# Altium PCB Webbie-V3.3.PcbDoc (part 3 of 3)
Units mil, origin at the board's own origin, x right, y up, seen from the top; angles counter-clockwise.
Board outline 3937.01 x 1574.8 mil, 4 copper layers (Top Layer, GND, GND-POWER, Bottom Layer), stack 61.865 mil thick; 129 components, 99 nets, 520 pads, 260 vias.
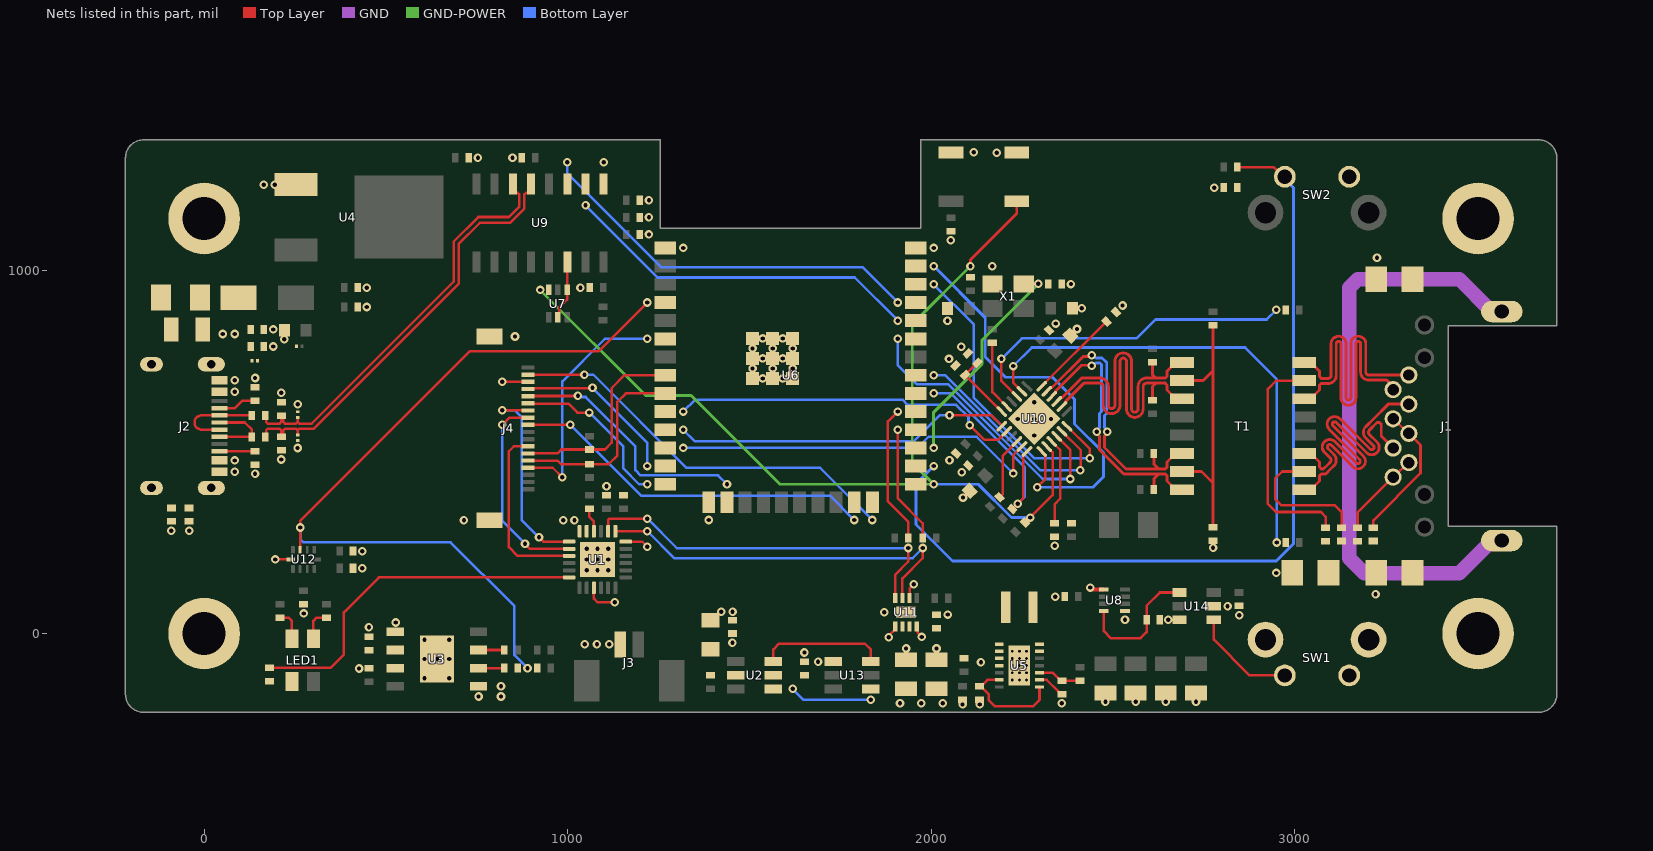
[diagram p4: the nets of this part, all layers, seen from the top]

## Via types
v1: diameter 23.62, hole 11.81, Top Layer to Bottom Layer, tented top, 251 vias
v2: diameter 19.68, hole 11.81, Top Layer to Bottom Layer, 9 vias

## Nets (pads, with @x,y where several pads share a name; then routed paths per layer and width w, separated by ;. In a path a pad name is that pad's centre, name@x,y a point inside that pad or via, vN(x,y) a via of type N, cw(c..) or ccw(c..) an arc to the next point about the centre after c; other vN are vias at no path point) (continued)
GND: C1.2 C2.2 C3.1 C4.1 C5.1 C6.1 C7.1 C8.1 C9.2 C10.2 C11.1 C12.2 C13.2 C14.1 C15.1 C16.1 C17.1 C18.1 C19.1 C20.2 C21.1 C22.1 C23.1 C24.2 C25.1 C26.1 C27.1 C28.2 C29.2 C30.1 C31.2 C32.1 C33.2 C34.2 C35.2 C36.1 C37.1 C38.1 C39.1 C40.1 C41.1 C42.2 C43.2 C45.1 D2.1 D3.2 D6.1 D7.1 J2.A1B12 J2.B1A12 J4.3 J4.MP1 J4.MP2 pad.G R1.2 R13.1 R16.1 R21.2 R24.1 R31.1 R32.1 R33.1 R43.1 R45.2 R48.1 R50.2 SW1.1 SW1.3 SW1.4 SW2.2 SW3.1 SW4.1 U1.9 U1.18 U1.23 U1.24 U1.25 U3.1 U3.3 U3.9 U4.1 U5.2 U5.15 U6.1 U6.15 U6.38 U6.39 U6.39_10 U6.39_11 U6.39_12 U6.39_13 U6.39_14 U6.39_15 U6.39_16 U6.39_17 U6.39_18 U6.39_19 U6.39_20 U6.39_21 U6.40 U6.41 U6.42 U6.43 U6.44 U6.45 U6.46 U6.47 U8.1 U8.5 U9.1 U10.25 U11.1 U11.4 U11.6 U11.9 U12.5 U13.1 U14.2 X1.2 | length 502.7
  Top Layer w7: v1(195.64,204) U12.5@238.31,204 ; v1(820.17,692.5) J4.3@891.03,692.5 ; U1.9@1071.94,126 1071.94,96.15 1081.79,86.31 v1(1129.45,86.31) ; U1.18@1159.54,252.97 1204.93,252.97 v1(1219.1,238.8) ; v1(1883.04,-9.68) 1883.04,-5.73 1900.94,12.17 U11.1@1900.94,20.05 ; U11.6@1940.32,98 1940.32,124.32 v1(1952,135.98) ; U11.4@1960,20.05 1962.41,17.64 1962.41,3.31 1973.67,-7.96 v1@1973.67,-8.7 ; U5.2@2297.61,-127.19 2317.57,-127.19 2350.18,-159.8 2350.18,-160.74 2355.68,-166.24 R24.1@2359.18,-166.24
  Top Layer w10: v1(2437,126.65) 2440.69,126.65 2445.99,121.34 U8.1@2474.47,121.34
  other v1: 2085.98,-194.83 2132.99,-194.83 2359.18,-191.65 1913.83,-191.33 1972.43,-191.33 2031.25,-191.33 2479.01,-187.39 2562.02,-187.39 2645.03,-187.39 2728.04,-187.39 606,-123 674,-123 426,-96 1688.52,-77.1 606,-70.04 640.28,-70.04 674,-70.04 1651.07,-52.06 1453.01,-25.09 606,-17.12 674,-17.12 1974.08,-9.11 453.22,17.29 526.61,30.6 2532.74,38.24 2846.93,50.73 2044.91,52.36 273.74,55.55 1870.73,58.7 2815,75.64 2341.28,101.66 3222,108 2948.5,166.9 434.8,179.81 434.8,226.82 2775,235.94 2339.2,241.54 -90.41,283.08 -41.4,283.09 714.45,311.8 987.81,312.07 1018.43,312.07 1388,312.4 2087.26,374.28 1106.53,405.51 139.98,439.34 2083.41,443.98 84.47,444.88 2050.15,477.21 212.21,478.95 256.86,510.47 2283.46,544.77 2237.69,590.55 2283.46,590.55 2329.24,590.55 257.14,630.79 2283.46,636.33 212.21,662.31 84.47,696.85 139.98,703.2 2048.67,755.59 2082.48,789.19 189.9,789.69 220.4,809.38 855.02,817.31 189.9,836.7 2400.82,838 2342.02,852.75 2044.67,860.83 2414.07,894.6 447.54,898.46 2526.17,902.52 447.53,951.72 1034.86,951.72 2384.07,961.53 2167.73,1010.83 3226,1033.73 1317.53,1060.83 2006.5,1060.83 2053.83,1081.69 1223.27,1098 1223.27,1145.01 1223.27,1192.02 2778.65,1226.69 164,1235 193.95,1235 1099,1296.5 752.91,1309 848.09,1309 2180.1,1323.06 2117,1324
  other v2: 1052.26,174.23 1081.79,174.23 1111.32,174.23 1052.26,203.76 1081.79,203.76 1111.32,203.76 1052.26,233.28 1081.79,233.28 1111.32,233.28
IO0: R30.1 R38.2 SW4.2 U6.25 U7.3 U10.14 | length 2776.7
  Top Layer w7: R30.1@2258,305.41 2258.14,305.41 v1(2271.92,319.19) 2271.92,319.33 2333.9,381.31 2333.9,498.36 U10.14@2317.58,514.68
  Top Layer w8: v1(2107.67,1010.83) 2107.86,1011.02 2107.86,1028.31 2235,1155.45 SW4.2@2235,1189.26
  GND-POWER w8: v1(924,945.4) 1214.4,655 1339.55,655 1583.72,410.83 2003.51,410.83 v1(2006.5,410.83) 1947.66,469.67 1947.66,850.82 v1(2107.67,1010.83)
  Bottom Layer w8: v1(2006.5,410.83) 2129.15,410.83 2220.79,319.19 v1(2271.92,319.19)
IO13_RMII_EMAC_RX_ER: R39.1 U10.10 | length 173.2
  Top Layer w7: R39.1@2187.84,375.13 2196.68,383.97 2196.68,489.85 U10.10@2235.43,528.59
IO16_OSC_EN: R45.1 U6.27 X1.1 | length 570.3
  GND-POWER w8: v1(2006.5,510.83) 2006.5,609.13 2139.89,742.52 2139.89,807.91 v1(2294.05,962.07)
IO18_RMII_MDIO: R36.1 U6.30 U10.12 | length 618.7
  Top Layer w7: R36.1@2222.61,341.96 v1(2237.91,357.26) 2253.22,372.57 2253.22,490.71 U10.12@2263.27,500.76
  Bottom Layer w7: v1(2006.5,660.83) 2054.09,660.83 2256.96,457.96 2256.96,376.31 v1(2237.91,357.26)
IO19_RMII_EMAC_TXD0: U6.31 U10.17 | length 638.4
  Top Layer w7: U10.17@2359.34,556.43 2411.11,504.67 v1@2411.11,450.9
  Bottom Layer w7: v1(2006.5,710.83) 2038.03,710.83 2299.34,449.52 v1(2409.72,449.52)
IO21_RMII_EMAC_TX_EN: U6.33 U10.16 | length 808.8
  Top Layer w7: U10.16@2345.42,542.51 2382.03,505.91 v1(2382.03,425.31)
  Bottom Layer w7: v1(1908.08,810.83) 1908.08,737.79 1959.77,686.11 2045.79,686.11 2306.58,425.31 v1(2382.03,425.31)
IO22_RMII_EMAC_TXD1: U6.36 U10.18 | length 860.2
  Top Layer w7: U10.18@2373.26,570.35 2436,507.61 v1(2436,482)
  Bottom Layer w7: v1(2006.5,960.83) 2116.19,851.14 2116.19,649.64 2283.83,482 v1(2436,482)
IO23_RMII_MDC: U6.37 U10.13 | length 1154.8
  Top Layer w7: v1(2291.12,402.71) 2313.71,425.31 2313.71,490.71 U10.13@2303.66,500.76
  Bottom Layer w8: v1(2006.5,1010.83) 2148.42,868.92 2148.42,760.75 2203.98,705.19 2333.42,705.19 2394.05,644.55 2394.05,576.94 2473.6,497.39 2473.6,431.2 2445.11,402.71 v1(2291.12,402.71)
IO25_RMII_EMAC_RXD0: U6.10 U10.8 | length 969.3
  Top Layer w7: v1(2105.49,573.41) 2145.57,533.34 2184.49,533.34 U10.8@2207.59,556.43
  Bottom Layer w7: v1(1317.53,610.83) 1349.44,642.74 1921.7,642.74 1935.05,629.39 2068.56,629.39 2102.31,595.64 2102.31,576.59 v1(2105.49,573.41)
IO26_RMII_EMAC_RXD1: U6.11 U10.7 | length 932.6
  Top Layer w7: v1(2050.15,601) 2164.83,601 2193.78,572.05 2193.78,570.47 U10.7@2193.67,570.35
  Bottom Layer w7: v1(1317.53,560.83) 1348.92,529.43 1951.9,529.43 2023.47,601 v1(2050.15,601)
IO27_RMII_EMAC_CRS_DV: U6.12 U10.11 | length 1046.3
  Top Layer w7: v1@2225.28,440.73 2225.28,490.61 U10.11@2249.35,514.68
  Bottom Layer w7: v1(1317.53,510.83) 1962.08,510.83 1992.8,541.55 2124.46,541.55 v1(2225.38,440.63)
LCD_BL: J4.2 U6.24 | length 1112.6
  Top Layer w7: J4.2@891.03,712.19 891.13,712.09 1045.83,712.09 v1(1045.93,712)
  Bottom Layer w7: v1(1045.93,712) 1070.7,712 1326.9,455.8 1694.6,455.8 v1(1838,312.4)
LCD_CS: J4.9 U6.23 | length 1005.5
  Top Layer w7: J4.9@891.03,574.39 v1(1007,574.39)
  Bottom Layer w7: v1(1007,574.39) 1202.09,379.31 1721.09,379.31 v1(1788,312.4)
LCD_DC: J4.7 U1.1 | length 570.3
  Top Layer w7: v1(820.17,614) 820.28,613.88 890.91,613.88 J4.7@891.03,613.76 ; v1(921,264.78) 932.81,252.97 U1.1@1004.03,252.97
  Bottom Layer w7: v1(820.17,614) 855.02,614 872.92,596.1 872.92,312.86 v1(921,264.78)
LCD_MISO: J4.6 U6.14 | length 456
  Top Layer w7: J4.6@891.03,633.45 891.76,632.72 1001.82,632.72 1026.54,608 v1(1059.52,608)
  Bottom Layer w7: v1(1059.52,608) 1060.29,608 1152.3,515.98 1152.3,454.94 1196.41,410.83 v1(1219.1,410.83)
LCD_MOSI: J4.5 U6.16 | length 685.9
  Top Layer w7: J4.5@891.03,653.13 891.46,653.57 1027.57,653.57 v1(1028,654)
  Bottom Layer w7: v1(1028,654) 1031.18,650.82 1049.42,650.82 1186.02,514.22 1186.02,449.53 1200.55,435 1413.83,435 v1(1438,410.83)
LCD_RST: J4.8 U1.2 | length 559.3
  Top Layer w7: v1(820.17,574.39) 839.85,594.08 J4.8@891.03,594.08 ; v1(882.37,247.46) 896.54,233.28 U1.2@1004.03,233.28
  Bottom Layer w7: v1(820.17,574.39) 820.17,309.66 v1(882.37,247.46)
LCD_SCLK: J4.4 U6.13 | length 456
  Top Layer w7: J4.4@891.03,672.82 892.52,674.31 1066.31,674.31 v1(1068,676)
  Bottom Layer w7: v1(1068,676) 1219.1,524.9 v1(1219.1,460.83)
"LOW BATT": R3.1 U1.6 | length 995
  Top Layer w7: R3.1@180,-94.5 347.5,-94.5 384.49,-57.51 384.49,58.23 480.8,154.54 U1.6@1004.03,154.54
MRX_N: J1.3 T1.11 | length 836.4
  Top Layer w8: T1.11@3025.87,495.87 3043.79,495.87 3067.75,471.91 3067.75,457.96 3072.43,453.28 3079.06,453.28 3089.61,463.82 3097.39,471.61 ccw(c3091.74,477.27) 3097.39,482.92 3081.34,498.97 cw(c3095.84,513.47) 3081.34,527.96 cw(c3095.84,513.47) 3110.34,527.96 3168.9,469.39 ccw(c3173.5,473.99) 3178.1,469.39 ccw(c3173.5,473.99) 3178.1,478.59 3094.86,561.82 cw(c3109.36,576.32) 3092.81,588.42 3092.81,588.76 3096.91,592.86 3097.25,592.86 cw(c3109.36,576.32) 3123.85,590.81 3206.85,507.81 ccw(c3211.45,512.41) 3216.04,507.81 ccw(c3211.45,512.41) 3216.04,517.01 3195.01,538.04 cw(c3210.53,553.63) 3194.97,569.19 3216.05,590.27 3256.89,631.1 J1.3@3313.47,631.11
MRX_P: J1.6 T1.9 | length 826.6
  Top Layer w8: T1.9@3025.87,395.87 3043.79,395.87 3067.75,419.83 3067.75,434.18 3072.85,439.28 3084.86,439.28 3099.52,453.94 3107.29,461.71 ccw(c3091.74,477.27) 3107.29,492.82 3091.24,508.87 cw(c3095.84,513.47) 3091.24,518.06 cw(c3095.84,513.47) 3100.44,518.06 3159,459.49 ccw(c3173.5,473.99) 3188,459.49 ccw(c3173.5,473.99) 3188,488.48 3104.76,571.72 cw(c3109.36,576.32) 3104.75,580.9 cw(c3109.36,576.32) 3113.95,580.91 3196.95,497.91 ccw(c3211.45,512.41) 3225.94,497.91 ccw(c3211.45,512.41) 3225.94,526.91 3204.87,547.98 cw(c3210.53,553.63) 3204.87,559.29 3225.96,580.38 3226.22,580.64 3232.85,580.64 3237.54,575.95 3237.54,543.25 J1.6@3270.16,510.62
MTX_N: J1.1 T1.16 | length 840.8
  Top Layer w8: T1.16@3025.87,745.87 3043.79,745.87 3067.75,721.91 3067.75,706.88 3072.43,702.19 3080.91,702.19 3091.91,702.19 ccw(c3091.91,710.19) 3099.91,710.19 3099.91,797.48 cw(c3120.41,797.48) 3140.91,797.48 3140.91,648.68 ccw(c3147.41,648.68) 3153.91,648.68 3153.91,797.46 cw(c3174.41,797.46) 3194.91,797.46 3194.91,719.41 ccw(c3202.91,719.41) 3202.91,711.41 3249.57,711.41 J1.1@3313.47,711.41
MTX_P: J1.2 T1.14 | length 812
  Top Layer w8: T1.14@3025.87,645.87 3043.79,645.87 3067.75,669.83 3067.75,683.5 3072.43,688.19 3080.9,688.19 3091.91,688.19 ccw(c3091.91,710.19) 3113.91,710.19 3113.91,797.48 cw(c3120.41,797.48) 3126.91,797.48 3126.91,648.68 ccw(c3147.41,648.68) 3167.91,648.68 3167.91,797.46 cw(c3174.41,797.46) 3180.91,797.46 3180.91,719.41 ccw(c3202.91,719.41) 3202.91,697.41 3249.57,697.41 3252.57,697.41 3264.78,685.2 3264.78,676.63 J1.2@3270.16,671.25
NetC3_2: C3.2 R11.1 T1.2 T1.7 | length 750.4
  Top Layer w8: T1.7@2690.05,445.87 2743.21,445.87 2775,414.08 ; T1.2@2690.05,695.87 2747.88,695.87 2775,722.98 ; C3.2@2775,292.5 2775,414.08 ; R11.1@2775,848.64 2775,722.98 ; 2775,414.08 2775,722.98
NetC4_2: C4.2 J1.13 J1.14 R13.2 | length 1684.1
  GND w40: J1.13@3569.37,255.9 3541.81,255.9 3451.91,166 3190.9,166 3149.96,206.94 3149.96,951.4 3173.39,974.83 3452.8,974.83 3541.81,885.83 J1.14@3569.37,885.83
NetC5_2: C5.2 R15.2 R19.2 R22.2 R23.2
NetC20_1: C20.1 U5.1 U5.13 | length 297.5
  Top Layer w7: C20.1@2132.99,-145.33 C20.1@2136.49,-145.33 ; U5.13@2187.37,-127.19 2154.63,-127.19 C20.1@2136.49,-145.33 ; U5.1@2297.61,-146.88 2297.61,-182.33 2280.64,-199.3 2174.05,-199.3 2158.31,-183.56 2158.31,-167.15 C20.1@2136.49,-145.33
NetC40_2: C40.2 J2.1 J2.2 J2.3 J2.4 R33.2
NetC44_1: C44.1 R44.1 U2.5
NetD1_2: D1.2 FB1.2
NetF1_2: F1.2 FB1.1
NetJ1_4: J1.4 J1.5 R22.1 | length 386.1
  Top Layer w7: R22.1@3215.73,291.7 3215.73,311.71 3345.59,441.57 3345.59,518.66 J1.5@3313.47,550.78 3311.9,550.78 3271.73,590.95 J1.4@3270.16,590.95
NetJ1_7: J1.7 J1.8 R23.1 | length 239.3
  Top Layer w7: R23.1@3172.67,291.36 3172.67,332.83 3270.16,430.31 3271.74,430.32 3311.9,470.48 J1.7@3313.47,470.48
NetJ2_A5: J2.A5 R31.2 | length 106.4
  Top Layer w7: J2.A5@42.13,620.08 84.47,620.08 105.18,640.79 R31.2@139.98,640.79
NetJ2_A6: J2.A6 J2.B6 R26.2 | length 205.7
  Top Layer w7: J2.B6@42.13,541.34 R26.2@130.9,541.34 ; J2.A6@42.13,580.71 111.54,580.71 130.98,561.27 R26.2@130.98,541.27
NetJ2_A7: J2.A7 J2.B7 R25.2 | length 248.3
  Top Layer w7: J2.A7@42.13,561.02 -6.67,561.02 cw(c-6.67,580.71) -26.35,580.71 cw(c-6.67,580.71) -6.67,600.39 J2.B7@42.13,600.39 R25.2@130.98,600.39
NetJ2_B5: J2.B5 R32.2 | length 97.9
  Top Layer w7: J2.B5@42.13,501.97 42.24,501.86 139.87,501.86 R32.2@139.98,501.76
NetL1_1: L1.1 U5.8 U5.9
NetL1_2: L1.2 U5.6 U5.7
NetLED1_1: LED1.1 R3.2
NetLED1_3: LED1.3 R4.1 | length 85.8
  Top Layer w7: R4.1@208.14,43.96 232.47,43.96 241.47,34.96 LED1.3@241.47,-13.73
NetLED1_4: LED1.4 R5.1 | length 88.6
  Top Layer w7: LED1.4@300.53,-13.73 300.53,34.96 309.53,43.96 R5.1@336.71,43.96
NetR10_1: R10.1 U1.22 | length 66.7
  Top Layer w7: R10.1@1059.52,343.09 1059.52,321.37 1071.94,308.95 U1.22@1071.94,281.51
NetR14_1: R14.1 R24.2 U5.3 | length 120.4
  Top Layer w7: U5.3@2297.61,-107.51 2333.95,-107.51 2355.68,-129.24 R24.2@2359.18,-129.24 ; R24.2@2359.18,-129.24 R14.1@2409.01,-129.2
NetR15_1: R15.1 T1.10 | length 384.6
  Top Layer w7: T1.10@3025.87,445.87 2965.29,445.87 2946,426.58 2946,370 2963,353 3110.1,353 3128.6,334.5 R15.1@3128.6,291.7
NetR19_1: R19.1 T1.15 | length 628.7
  Top Layer w7: T1.15@3025.87,695.87 2948.87,695.87 2926,673 2926,357 2948.5,334.5 3071.5,334.5 3084.53,321.47 R19.1@3084.53,291.36
NetR40_1: R40.1 U10.3 | length 932.8
  Top Layer w7: v1(2192.83,755.76) 2192.83,695.1 U10.3@2235.43,652.51
  Bottom Layer w7: v1(2192.83,755.76) 2249.07,812 2565,812 2617,864 2922.22,864 v1(2948.87,890.64)
NetR42_1: R42.1 U10.2 | length 1311.1
  Top Layer w7: v1(2225.38,735.96) 2224.84,735.42 2224.84,690.93 U10.2@2249.35,666.43
  Bottom Layer w7: v1(2225.38,735.96) 2276.42,786.99 2863.01,786.99 2949.96,700.04 v1(2949.96,250.55)
NetR43_2: R43.2 U10.24 | length 251.8
  Top Layer w7: U10.24@2303.66,680.35 2481.5,858.19 R43.2@2481.77,858.19
NetR48_2: R48.2 U2.2
NetR50_1: R50.1 U3.2
NetR51_2: R51.2 U3.6 | length 70.6
  Top Layer w7: U3.6@754.79,-95.04 R51.2@825.42,-95.04
NetR52_2: R52.2 U3.7 | length 70.6
  Top Layer w7: U3.7@754.79,-45.04 R52.2@825.42,-45.04
NetSW1_2: SW1.2 U14.1 | length 290.6
  Top Layer w7: U14.1@2777.35,38.24 2777.35,-16.54 2875.78,-114.96 SW1.2@2972.44,-114.96
NetU2_1: U2.1 U13.4 | length 227.4
  Bottom Layer w7: v1(1618.61,-151.9) 1648.71,-182 v1(1833.57,-182)
NetU2_3: U2.3 U13.6 | length 348.3
  Top Layer w7: U2.3@1565.68,-77.1 1565.68,-43.17 1581.41,-27.44 1817.03,-27.44 1833.57,-43.98 U13.6@1833.57,-77.1
nRST: C36.2 R37.1 U10.15 | length 240.6
  Top Layer w7: U10.15@2331.5,528.59 2354.68,505.42 2354.68,371.04 2339.2,355.56 C36.2@2339.2,303.96
ORING_EN: R17.2 U8.4 U14.4 | length 366
  Top Layer w7: U8.4@2474.47,62.29 2474.47,6.71 2493.34,-12.15 2575.57,-12.15 2592.02,4.3 R17.2@2592.02,38.24 2592.02,76.59 2628.47,113.04 U14.4@2682.86,113.04
OSCIN: R41.2 U10.5 | length 191.5
  Top Layer w7: R41.2@2167.73,799.65 2168.16,799.21 2168.16,664.1 U10.5@2207.59,624.67
OUT/BATT+: C19.2 C25.2 C43.1 C45.2 J3.1 R12.1 R17.1 R44.2 U3.5 U5.10 U5.11 U11.2 U11.3 U14.6
  other v1: 754.79,-173 816.42,-173 816.42,-145.04 2136.49,-78.66 1930.64,-40.94 2014.44,-40.94 1046.75,-29.61 1080.32,-29.61 1113.89,-29.62 2651.6,38.22 1422.01,60.27 1453.43,60.27
RESET: C10.1 R20.1 SW2.1 U6.26 | length 2442.5
  Top Layer w7: R20.1@2841.07,1283 2941.47,1283 2967.77,1256.69 SW2.1@2972.44,1256.69
  Bottom Layer w8: v1(2006.5,460.83) 1957.74,412.06 1957.74,300.26 2058.63,199.37 2949.01,199.37 2995.79,246.15 2995.79,1227.28 2972.44,1250.63 SW2.1@2972.44,1256.69
RTS: U7.1 U7.5 U9.14 | length 162.9
  Top Layer w7: U7.5@973,870.6 973,877.49 976.48,880.97 976.48,896.92 998.59,919.03 U7.1@998.59,945.4 998.8,945.61 998.8,1022.51 U9.14@999,1022.72
RX_N: R35.1 T1.8 U10.22 | length 752.5
  Top Layer w8: U10.22@2331.5,652.51 2341.82,662.83 2341.82,666.85 2413.19,738.21 2439.79,738.21 v1(2441,737) ; v1(2455.38,555) 2455.38,550.77 2462.69,543.46 2462.69,505.73 2521.35,447.07 2529.55,438.87 2578.39,438.87 2625.45,438.87 ; R35.1@2612.04,395.87 2612.04,425.46 2625.45,438.87 ; T1.8@2690.05,395.87 2672.13,395.87 2648.17,419.83 2648.17,434.18 2643.49,438.87 2625.45,438.87
  Bottom Layer w8: v1(2441,737) 2445.23,737 2452.54,744.31 2463.81,744.31 2468.5,739.62 2468.5,611.49 2462.69,605.69 2462.69,566.54 2455.38,559.23 v1(2455.38,555)
RX_P: R34.1 T1.6 U10.23 | length 769.2
  Top Layer w8: U10.23@2317.58,666.43 2327.9,676.75 2331.92,676.75 2417.81,762.63 2438.01,762.63 v1(2441,765.62) ; v1(2484,555) 2484,550.77 2476.69,543.46 2476.69,511.53 2535.35,452.87 2592.39,452.87 2625.45,452.87 ; R34.1@2612.04,495.87 2612.04,466.28 2625.45,452.87 ; T1.6@2690.05,495.87 2672.13,495.87 2648.17,471.91 2648.17,457.55 2643.49,452.87 2625.45,452.87
  Bottom Layer w8: v1(2441,765.62) 2445.23,765.62 2452.54,758.31 2469.61,758.31 2482.5,745.42 2482.5,605.69 2476.69,599.89 2476.69,566.54 2484,559.23 v1(2484,555)
RXD: U6.34 U9.2 | length 990.5
  Bottom Layer w7: v1(1049,1178.03) 1247.51,979.51 1789.39,979.51 v1(1908.08,860.83)
SCL: R9.1 U1.19 U6.28 U11.7 | length 1374.2
  Top Layer w7: U1.19@1131,281.51 v1(1219.1,281.51) ; v1(1908.08,560.83) 1908.08,371.82 1976.5,303.4 R9.1@1976.5,263 ; U11.7@1920.63,98 1920.63,152 1976.5,207.87 v1(1976.5,235.44)
  Bottom Layer w7: v1(1219.1,281.51) 1292.74,207.87 1948.94,207.87 v1(1976.5,235.44)
SDA: R8.1 U1.20 U6.29 U11.8 | length 1432.8
  Top Layer w7: U1.20@1111.32,281.51 1111.32,312.07 1115.42,316.17 v1(1219.1,316.17) ; U11.8@1900.94,98 1900.94,162.16 1936.49,197.71 v1(1936.49,235.44) ; v1(1908.08,610.83) 1880.7,583.45 1880.7,363.67 1936.49,307.88 R8.1@1936.49,255.47
  Bottom Layer w7: v1(1219.1,316.17) 1299.84,235.44 v1(1936.49,235.44)
STDBY: R46.1 R51.1 U6.4 U12.3 | length 2166.8
  Top Layer w7: U12.3@263.9,230.57 263.95,230.62 263.95,309.95 731.23,777.23 1085.48,777.23 1181.07,872.83 ; 1181.1,872.83 v1(1219.1,910.83)
  Bottom Layer w7: v1(264,292) 264,260 273.12,250.88 678.12,250.88 853.42,75.58 853.42,-59.03 v1(889.43,-95.04)
TP_INT: J4.15 U6.6 | length 651.3
  Top Layer w7: J4.15@891.03,456.28 958.72,456.28 v1(985,430)
  Bottom Layer w7: v1(985,430) 985,694 1101.83,810.83 v1(1219.1,810.83)
TP_RST: J4.12 U1.3 | length 498.8
  Top Layer w7: J4.12@891.03,515.34 851.66,515.34 837.88,501.56 837.88,237.72 862,213.6 U1.3@1004.03,213.6
TP_SCL: J4.13 R7.1 U6.8 | length 554.2
  Top Layer w7: J4.13@891.03,495.65 971.51,495.65 982.25,506.4 R7.1@1059.52,506.4 1102.1,506.4 1121,525.3 1121,675.2 1156.63,710.83 U6.8@1268.31,710.83
TP_SDA: J4.14 R6.1 U6.9 | length 548.2
  Top Layer w7: J4.14@891.03,475.97 972.09,475.97 981.67,466.39 R6.1@1059.52,466.39 1112.87,466.39 1136.73,490.25 1136.73,637.73 1159.83,660.83 U6.9@1268.31,660.83
TX_N: R29.1 T1.3 U10.20 | length 875.4
  Top Layer w8: U10.20@2359.34,624.67 2369.66,634.99 2369.66,639.01 2419.52,688.87 2436.51,688.87 2463.89,688.87 cw(c2463.89,679.87) 2472.89,679.87 2472.89,628.15 ccw(c2495.89,628.15) 2518.89,628.15 2518.89,748.87 cw(c2527.89,748.87) 2536.89,748.87 2536.89,617.93 ccw(c2559.89,617.93) 2582.89,617.93 2582.89,679.87 cw(c2591.89,679.87) 2591.89,688.87 2602.89,688.87 2617.84,688.87 ; R29.1@2608.34,641.65 2608.34,679.37 2617.84,688.87 ; T1.3@2690.05,645.87 2672.13,645.87 2648.17,669.83 2648.17,684.18 2643.49,688.87 2617.84,688.87
TX_P: R28.1 T1.1 U10.21 | length 883.3
  Top Layer w8: U10.21@2345.42,638.59 2355.74,648.91 2359.76,648.91 2413.72,702.87 2436.51,702.87 2463.89,702.87 cw(c2463.89,679.87) 2486.89,679.87 2486.89,628.15 ccw(c2495.89,628.15) 2504.89,628.15 2504.89,748.87 cw(c2527.89,748.87) 2550.89,748.87 2550.89,617.93 ccw(c2559.89,617.93) 2568.89,617.93 2568.89,679.87 cw(c2591.89,679.87) 2591.89,702.87 2602.89,702.87 2617.84,702.87 ; R28.1@2608.54,746.5 2608.54,712.17 2617.84,702.87 ; T1.1@2690.05,745.87 2672.13,745.87 2648.17,721.91 2648.17,707.55 2643.49,702.87 2617.84,702.87
TXD: U6.35 U9.3 | length 1086.7
  Bottom Layer w7: v1(999,1296.5) 999,1266.08 1257.81,1007.27 1811.64,1007.27 v1(1908.08,910.83)
USB_N: C14.2 D6.2 R25.1 U9.6 | length 1153.5
  Top Layer w7: R25.1@167.98,600.39 170.23,598.14 170.23,582.52 174.92,577.83 188.79,577.83 188.99,577.63 207.52,577.63 212.21,582.32 C14.2@212.21,599.89 ; C14.2@212.21,599.89 212.59,599.89 217.59,594.89 217.59,582.31 222.27,577.63 230.29,577.63 252.31,577.63 257,582.32 ; D6.2@257,594.52 257,582.32 ; 261.69,577.63 257,582.32 ; 263.29,577.63 295.83,577.63 686,967.8 686,1077.8 754.2,1146 838,1146 867,1175 867,1207.8 862.31,1212.49 856,1212.49 849,1219.49 U9.6@849,1237.26
USB_P: C39.2 D7.2 R26.1 U9.5 | length 1178.3
  Top Layer w7: R26.1@167.98,541.27 170.23,543.52 170.23,559.14 174.92,563.83 183,563.83 183.19,563.63 207.52,563.63 212.21,558.94 C39.2@212.21,541.37 212.59,541.37 217.59,546.37 217.59,558.94 222.27,563.63 236.09,563.63 252.31,563.63 257,558.94 ; D7.2@257,546.74 257,558.94 ; U9.5@899,1237.26 899,1219.49 892,1212.49 885.69,1212.49 881,1207.8 881,1169.2 841.79,1129.99 757.99,1129.99 700,1072 700,962 301.63,563.63 261.69,563.63 257,558.94
VDDCR: C32.2 C33.1 U10.6 | length 190.1
  Top Layer w7: C32.2@2093,711.2 2093.11,711.2 2126.24,744.33 C33.1@2126.24,745.43 ; C32.2@2093.22,711.2 U10.6@2193.67,610.75
VUSB: C12.1 C13.1 D3.1 F1.1 J2.A4B9 J2.B4A9
  other v1: 84.47,476.38 84.47,665.35 51.32,824.2 84.47,824.2
pads on no net: J2.A8 J2.B8 J3.MP1 J3.MP2 J4.10 J4.11 J4.16 J4.17 J4.18 SW2.3 SW2.4 T1.4 T1.5 T1.12 T1.13 U1.10 U1.11 U1.12 U1.13 U1.14 U1.15 U1.16 U1.17 U2.4 U5.14 U6.7 U6.17 U6.18 U6.19 U6.20 U6.21 U6.22 U6.32 U8.8 U9.7 U9.8 U9.9 U9.10 U9.11 U9.12 U9.15 U10.4 U13.2 U13.5

## Polygon pours and split planes (outlines as drawn)
NetC4_2 on Top Layer "NONET_L-01_P-001" (solid, remove dead copper, pour order 19): 3541.81,856.3 3596.93,856.3 3626.46,885.83 3502.45,1009.83 3294,1009.83 3294,939.83 3458.28,939.83
NetC4_2 on Top Layer "NONET_L-01_P-001" (solid, remove dead copper, pour order 18): 3541.81,285.43 3596.93,285.43 3626.46,255.9 3502.45,131.9 3294,131.9 3294,201.9 3458.28,201.9
GND on Top Layer "NONET_L-01_P-001" (solid, remove dead copper, pour order 61): 3670.47,1341.77 cw(c3670.47,1308.27) 3703.97,1308.27 3703.97,908 3270.2,908 3270.16,907.95 3270.16,251.97 3709.34,251.97 3709.34,-166.57 cw(c3673.17,-166.57) 3673.17,-202.74 -166.39,-202.74 cw(c-166.39,-172.08) -197.06,-172.08 -197.06,1311.25 cw(c-166.53,1311.25) -166.53,1341.77 1238,1341.77 1238,1096 1990,1096 1990,1341.77
GND on Top Layer "NONET_L-01_P-001" (solid, remove dead copper, pour order 54): 1057.77,266.76 1027.06,266.76 1027.06,281.51 1018.43,290.14 978.2,290.14 972.09,296.26 972.09,323.4 980.39,331.7 1022.33,331.7 1057.77,296.26
3.3V_ESP on Top Layer "NONET_L-01_P-001" (solid, remove dead copper, pour order 48): 938,1208.49 938,1288.81 930.31,1296.5 901.5,1296.5 901.5,1321.5 937.28,1321.5 960,1298.78 960,1208.49
3.3V_ESP on Top Layer "NONET_L-01_P-001" (solid, remove dead copper, pour order 29): 1106.27,939.22 1106.27,970.22 1129.17,993.11 1297.84,993.11 1297.84,1028.54 1200.38,1028.54 1169.86,1059.07 1169.86,1204.52 1151.86,1204.52 1151.86,1059.66 1143.68,1051.49 1088,1051.49 1088,939.22
NetC40_2 on Top Layer "NONET_L-01_P-001" (solid, remove dead copper, pour order 34): 52.38,336.49 52.38,415.96 -99.04,415.96 -113.38,430.3 -113.38,708.66 -100.79,721.26 37.4,721.26 37.4,760.63 -6.19,760.63 -176.38,760.63 -176.38,336.49
OUT/BATT+ on Top Layer "NONET_L-01_P-001" (solid, remove dead copper, pour order 40): 1368.01,16.83 1418.01,16.83 1429.51,28.33 1465.51,28.33 1465.51,74.49 1460,80 1368,80 1368,16.83
OUT/BATT+ on Top Layer "NONET_L-01_P-001" (solid, remove dead copper, pour order 38): 731.17,-133.23 834.42,-133.23 834.42,-187.09 731.17,-187.09
+3V3_USB on Top Layer "NONET_L-01_P-001" (solid, remove dead copper, pour order 28): 699.5,1321.5 474.96,1321.5 413.63,1260.17 413.63,1031.83 657.72,1031.83 657.72,1254.72 699.5,1296.5
3.3V_ESP on Top Layer "NONET_L-01_P-001" (solid, remove dead copper, pour order 17): 2403.63,126.65 2403.59,126.7 2394.7,126.7 2394.7,117.72 2394.7,89.16 2412.7,89.16 2412.7,95.75 2545.93,95.75 2545.93,107.57 2517.42,107.57 2514.5,110.49 2514.5,134.73 2546.16,166.39 2461.29,166.39 2492.81,134.87 2492.81,110.24 2490.13,107.57 2412.7,107.57 2412.7,126.65
AVDD on Top Layer "NONET_L-01_P-001" (solid, remove dead copper, pour order 31): 2279.97,670.3 2266.6,683.68 2266.6,690.47 2330.55,754.42 2341.93,754.42 2363.14,775.63 2338.39,800.38 2318.39,800.38 2295.15,823.62 2282.42,810.89 2300.1,793.21 2300.1,768.57 2246.56,715.03 2246.56,690.39 2273.31,663.64
+5V_OUT on Top Layer "NONET_L-01_P-001" (solid, remove dead copper, pour order 27): 193.95,1086.5 193.95,1023.5 203.01,1014.44 203.01,890.54 244.86,890.54 265.4,869.99 265.4,795.78 265.4,785.77 293.94,785.77 295.4,787.23 394.12,885.96 394.11,885.97 394.11,964.22 346.78,964.22 312.05,998.95 312.05,1086.5
NetD1_2 on Top Layer "NONET_L-01_P-001" (solid, remove dead copper, pour order 26): -39.02,959.83 -39.02,888.17 43.17,888.17 45.53,890.54 143.96,890.54 143.96,957.46 45.53,957.46 43.17,959.83 16.1,959.83
NetF1_2 on Top Layer "NONET_L-01_P-001" (solid, remove dead copper, pour order 25): -90.98,890.53 -70.62,870.16 -70.62,803.23 -109.99,803.23 -109.99,852.06 -146.1,888.17 -146.1,959.83 -90.98,959.83
VUSB on Top Layer "NONET_L-01_P-001" (solid, remove dead copper, pour order 24): -23.38,870.16 15.99,870.16 36.96,849.2 136.48,849.2 136.48,777.19 135.06,775.76 135.06,745.36 105.18,745.36 105.18,780.98 82.92,803.23 -23.38,803.23
NetC5_2 on Top Layer "NONET_L-01_P-001" (solid, remove dead copper, pour order 20): 3228.23,263.7 3227.89,263.36 3072.03,263.36 3062.96,254.29 3062.96,131.9 3122.96,131.9 3122.96,227.56 3141.1,245.7 3228.23,245.7
+3V3_BATT on Top Layer "NONET_L-01_P-001" (solid, remove dead copper, pour order 12): 2398.69,-63.41 2421.51,-40.6 2421.51,76.07 2433.32,87.88 2487.66,87.88 2487.66,76.07 2444.07,76.07 2437,69 2437,-40.92 2758.04,-40.92 2758.04,-103.39 2398.69,-103.39 2387.86,-92.55 2285.8,-92.55 2285.8,-63.41
NetL1_2 on Top Layer "NONET_L-01_P-001" (solid, remove dead copper, pour order 10): 2267.1,115.31 2292.69,115.31 2309.42,98.57 2309.42,-53.18 2285.8,-53.18 2285.8,9.99 2267.1,28.69
NetL1_1 on Top Layer "NONET_L-01_P-001" (solid, remove dead copper, pour order 9): 2217.88,115.31 2192.29,115.31 2175.56,98.57 2175.56,-53.18 2199.18,-53.18 2199.18,9.99 2217.88,28.69
OUT/BATT+ on Top Layer "NONET_L-01_P-001" (solid, remove dead copper, pour order 5): 1963.72,-36.54 1946.22,-19.04 1946.22,33.83 1914.72,33.83 1914.72,-20.62 1900.41,-34.94 1900.41,-92 2044.44,-92 2059.12,-77.32 2102.22,-77.32 2117.44,-92.55 2199.18,-92.55 2199.18,-63.41 2132.99,-63.41 2102.28,-32.71 2039.15,-32.71 2026.94,-20.49 2026.94,24.36 2001.94,24.36 2001.94,-19.04 1984.44,-36.54
NetC44_1 on Top Layer "NONET_L-01_P-001" (solid, remove dead copper, pour order 7): 1418.01,-23.17 1418.01,-93.63 1426.67,-102.3 1486.54,-102.3 1486.54,-126.7 1377.72,-126.7 1368.01,-117 1368.01,-23.17
B- on Top Layer "NONET_L-01_P-001" (solid, remove dead copper, pour order 4): 1706.41,-139.7 1706.41,-164.11 1688.52,-182 1504.44,-182 1486.54,-164.11 1486.54,-139.7 1380.5,-139.7 1380.5,-209.07 1736.7,-209.07 1754.44,-191.33 1754.44,-139.7
3.3V_ESP on Top Layer "NONET_L-01_P-001" (solid, remove dead copper, pour order 0): 381.39,239.32 381.39,167.31 349.83,167.31 319.04,198.09 299.32,198.09 299.32,209.91 319.04,209.91 348.45,239.32
3.3V_ESP on GND-POWER "NONET_L-01_P-001" (solid, remove dead copper, pour order 47): 3670.47,1341.77 cw(c3670.47,1308.27) 3703.97,1308.27 3703.97,908 3270.2,908 3270.16,907.95 3270.16,251.97 3709.34,251.97 3709.34,-166.57 cw(c3673.17,-166.57) 3673.17,-202.74 -166.39,-202.74 cw(c-166.39,-172.07) -197.06,-172.07 -197.06,1311.25 cw(c-166.53,1311.25) -166.53,1341.77 1238,1341.77 1238,1096 1990,1096 1990,1341.77
OUT/BATT+ on GND-POWER "NONET_L-01_P-001" (solid, remove dead copper, pour order 41): 2101.24,-4.04 2101.24,-47.55 2120.19,-66.5 2158.31,-66.5 2158.31,-91.35 2111.5,-91.35 2073.77,-53.62 1765.74,-53.62 1664.41,47.71 1372.64,47.71 1359.41,34.48 1159.51,34.48 1130.51,5.47 1130.51,-134.49 1077.91,-187.09 731.17,-187.09 731.17,-133.23 1009.77,-133.23 1029,-114 1029,11.64 1074.18,56.83 1333.83,56.83 1348.84,71.84 1672.92,71.84 1773.37,-28.6 2044.91,-28.6 2118.98,46.21 2362.3,46.21 2417.51,-9 2633,-9 2638.02,-3.98 2638.02,46.21 2641.52,49.71 2660.74,49.71 2663.87,46.59 2663.87,-13.96 2651.83,-26 2408.1,-26 2353.41,28.69 2133.98,28.69
AVDD on GND-POWER "NONET_L-01_P-001" (solid, remove dead copper, pour order 46): 2564.8,660.2 2591.32,686.72 2591.32,768.79 2591.32,877.39 2645.33,931.39 2799.97,931.39 2920.42,810.94 3347.16,810.94 3410.66,747.44 3410.66,301.49 3372.68,263.51 3329.34,263.51 3329.34,320.53 3377.18,320.53 3394,337.35 3394,683.85 3301.69,776.17 2897.64,776.17 2782.54,891.27 2685.75,891.27 2633.86,839.38 2633.86,550.3 2572,488.44 2572,385.78 2449.73,263.51 2422.35,263.51 2422.35,332.23 2466.23,332.23 2528.7,394.7 2528.7,503.64 2591.32,566.27 2591.32,600.27 2565.28,626.32 2420.8,626.32 2290.02,757.11 2317.13,784.22 2441.16,660.2
+5V_OUT on GND-POWER "NONET_L-01_P-001" (solid, remove dead copper, pour order 45): 731.29,34.82 749.34,16.77 772.51,16.77 795.83,-6.55 817.14,-6.55 817.14,46.86 771,93 571.4,93 540.4,124 540.4,724.69 372.61,892.47 372.61,962.05 370.45,964.22 336.17,964.22 329.41,957.46 329.41,898.46 321.78,890.83 299.24,890.83 295.4,886.98 295.4,826.03 312.05,809.38 401.62,809.38 502,709 502,-83.64 440.72,-144.92 440.72,-176 502.15,-176 565.28,-112.87 565.28,38.28 590,63 721.17,63 731.29,52.88
B- on GND-POWER "NONET_L-01_P-001" (solid, remove dead copper, pour order 42): 1302.6,-65.04 1394.84,-157.28 1394.84,-202 1486.54,-202 1486.54,-166.39 1315.33,4.82 1315.32,5.83 1208.06,5.83 1208.06,-65.04
VUSB on GND-POWER "NONET_L-01_P-001" (solid, remove dead copper, pour order 43): -17.72,505.05 -17.72,505.72 -29.31,517 -29.32,622.07 -11.03,640.36 76.96,640.36 96.75,660.15 96.75,670.52 89.29,677.98 78.68,677.98 57.9,657.2 -11.02,657.2 -29,675.18 -29,797.61 -15.15,811.46 98.6,811.46 98.6,837.31 -21.65,837.31 -49,809.96 -49,505.63 -29.6,486.23 56.85,486.23 79.34,463.75 89.22,463.75 96.75,471.27 96.75,481.81 73.51,505.05
GND on GND "NONET_L-01_P-001" (solid, remove dead copper, pour order 52): 3670.47,1341.77 cw(c3670.47,1308.27) 3703.97,1308.27 3703.97,908 3270.2,908 3270.16,907.95 3270.16,251.97 3709.34,251.97 3709.34,-166.57 cw(c3673.17,-166.57) 3673.17,-202.74 -166.39,-202.74 cw(c-166.39,-172.08) -197.06,-172.08 -197.06,1311.25 cw(c-166.53,1311.25) -166.53,1341.77 1238,1341.77 1238,1096 1990,1096 1990,1341.77
GND on Bottom Layer "NONET_L-01_P-001" (solid, remove dead copper, pour order 59): 3670.47,1341.77 cw(c3670.47,1308.27) 3703.97,1308.27 3703.97,908 3270.2,908 3270.16,907.95 3270.16,251.97 3709.34,251.97 3709.34,-166.57 cw(c3673.17,-166.57) 3673.17,-202.74 -166.39,-202.74 cw(c-166.39,-172.08) -197.06,-172.08 -197.06,1311.25 cw(c-166.53,1311.25) -166.53,1341.77 1238,1341.77 1238,1096 1990,1096 1990,1341.77

## Other copper
Top Layer:
  region net 3.3V_ESP: 944.43,-32.55 944.43,-57.55 995.66,-57.55 995.66,-32.55
  rectangle net +5V_OUT: 440.71,-176 465.71,-123.35
  region net GND: 261.72,534.93 252.28,534.93 252.28,510.47 261.72,510.47
  rectangle net GND: 252.28,606.33 261.72,630.79
  rectangle net GND: 142.93,703.2 150.8,754.81
  rectangle net GND: 189.9,785.81 257.57,795.26
  rectangle net GND: 144,1203.5 312.05,1266.5
  rectangle net GND: 1088,1208.49 1110,1296.5
  rectangle net GND: 2140.18,937.91 2195.3,1010.83
  rectangle net GND: 2020.47,1306.98 2268.86,1339.26
  region net GND: 3258,1047.73 3194,1047.73 3194,939.83 3258,939.83
  rectangle net GND: 3190,94 3254,201.9
  rectangle net GND: 2948.5,131.9 3022.96,201.9
  rectangle net GND: 2757.67,63.83 2859.43,87.45
  rectangle net GND: 2449.01,-202.52 2758.04,-143.39
  rectangle net GND: 1900.41,-202.74 2044.44,-132
  rectangle net GND: 502.15,-6.85 549.4,45.33
  region net GND: 820.17,333.45 714.58,333.45 714.58,290.14 820.17,290.14
  rectangle net GND: 749.3,795.65 854.88,838.96
  region net 3.3V_ESP: 2661.27,335.17 2567.92,335.17 2567.92,263.51 2661.27,263.51
  rectangle net AVDD: 2422.6,263.51 2515.95,335.17
  rectangle net IO0: 2095.17,970.86 2120.17,1010.83
  rectangle net IO0: 924,931.03 954.89,959.77
  region net IO0: 2006.5,428.54 1927.76,428.54 1927.76,393.11 2006.5,393.11
  region net IO16_OSC_EN: 2006.5,528.54 1927.76,528.54 1927.76,493.11 2006.5,493.11
  rectangle net GND: 2029.67,860.83 2059.67,911.85
  rectangle net GND: 1688.52,-89.3 1754.44,-64.89
  rectangle net GND: 1930.47,43.36 2026.94,61.36
  rectangle net GND: 1857.59,43.28 1957.64,74.77
  region net GND: 2813.06,1214.19 2813.06,1239.19 2778.65,1239.19 2778.65,1214.19
  region net GND: 2492.73,886.83 2510.41,869.15 2534.75,893.48 2517.07,911.16
  region net GND: 2349.66,974.03 2349.66,949.03 2384.07,949.03 2384.07,974.03
  region net GND: 2379.66,907.1 2379.66,882.1 2414.07,882.1 2414.07,907.1
  region net GND: 2787.5,264.5 2762.5,264.5 2762.5,230.09 2787.5,230.09
  region net GND: 2367.38,822.3 2385.06,804.62 2409.4,828.96 2391.72,846.63
  region net GND: 2351.7,275.96 2326.7,275.96 2326.7,241.54 2351.7,241.54
  region net GND: 2308.58,837.05 2326.26,819.38 2350.6,843.71 2332.92,861.39
  region net GND: 2375.7,89.16 2375.7,114.16 2341.28,114.16 2341.28,89.16
  region net GND: 2098.17,755.76 2115.85,773.43 2091.52,797.77 2073.84,780.09
  region net GND: 2066.33,1116.11 2041.33,1116.11 2041.33,1081.69 2066.33,1081.69
  region net GND: 2006.5,1078.54 1927.76,1078.54 1927.76,1043.11 2006.5,1043.11
  region net GND: 2083.59,492.9 2065.91,510.58 2041.58,486.25 2059.25,468.57
  region net GND: 2116.84,459.68 2099.17,477.35 2074.83,453.02 2092.51,435.34
  region net GND: 2120.7,389.97 2103.02,407.65 2078.68,383.32 2096.36,365.64
  region net GND: 2064.36,722.16 2082.04,739.83 2057.71,764.17 2040.03,746.49
  region net GND: 2859.43,85.14 2834.43,85.14 2834.43,50.73 2859.43,50.73
  rectangle net GND: 2519.55,38.24 2545.93,68.19
  region net GND: 2371.68,-157.24 2346.68,-157.24 2346.68,-191.65 2371.68,-191.65
  rectangle net GND: 2005.44,43.36 2044.91,61.36
  region net GND: 2145.49,-173.33 2120.49,-173.33 2120.49,-199.53 2145.49,-199.53
  rectangle net GND: 1638.57,-86.47 1663.57,-52.06
  region net GND: 2098.48,-173.33 2073.48,-173.33 2073.48,-199.36 2098.48,-199.36
  region net GND: 1188.86,1204.52 1188.86,1179.52 1223.27,1179.52 1223.27,1204.52
  region net GND: 1188.86,1157.51 1188.86,1132.51 1223.27,1132.51 1223.27,1157.51
  region net GND: 1188.86,1110.5 1188.86,1085.5 1223.27,1085.5 1223.27,1110.5
  region net GND: 882.5,1296.5 882.5,1321.5 848.09,1321.5 848.09,1296.5
  region net GND: 718.5,1321.5 718.5,1296.5 752.91,1296.5 752.91,1321.5
  region net GND: 1317.53,1078.54 1238.79,1078.54 1238.79,1043.11 1317.53,1043.11
  region net GND: 1069.27,939.22 1069.27,964.22 1034.86,964.22 1034.86,939.22
  region net GND: 413.11,964.22 413.11,939.22 447.53,939.22 447.53,964.22
  region net GND: 413.12,910.96 413.12,885.96 447.54,885.96 447.54,910.96
  region net GND: 232.9,843.8 207.9,843.8 207.9,809.38 232.9,809.38
  region net GND: 155.48,849.2 155.48,824.2 189.9,824.2 189.9,849.2
  region net GND: 155.48,802.19 155.48,777.19 189.9,777.19 189.9,802.19
  rectangle net GND: 199.71,627.89 224.71,662.31
  region net GND: 224.71,513.37 199.71,513.37 199.71,478.95 224.71,478.95
  rectangle net GND: 19.69,685.04 84.47,708.66
  rectangle net GND: 127.48,668.79 152.48,703.2
  region net GND: 1405.72,312.4 1405.72,391.14 1370.28,391.14 1370.28,312.4
  rectangle net GND: 1106.53,371.09 1166.04,389.09
  rectangle net GND: 1094.03,371.1 1119.03,405.51
  region net GND: 1465.51,9.33 1440.51,9.33 1440.51,-25.09 1465.51,-25.09
  region net GND: 400.39,239.32 400.39,214.32 434.8,214.32 434.8,239.32
  region net GND: 152.48,473.76 127.48,473.76 127.48,439.34 152.48,439.34
  rectangle net GND: 19.69,433.07 84.47,456.69
  region net GND: -28.9,317.5 -53.9,317.5 -53.9,283.09 -28.9,283.09
  region net GND: -77.91,317.49 -102.91,317.49 -102.91,283.08 -77.91,283.08
  rectangle net GND: 440.72,-17.12 465.72,17.29
  rectangle net GND: 426,-104.12 525.77,-86.12
  region net GND: 400.39,192.31 400.39,167.31 434.8,167.31 434.8,192.31
  region net GND: 286.24,89.96 261.24,89.96 261.24,55.55 286.24,55.55
  rectangle net CLK50M: 2092.88,876.85 2167.88,911.85
  rectangle net CLK50M: 2095.21,894.35 2120.21,951.86
  rectangle net CLK50M: 2155.23,827.65 2180.23,894.6
  rectangle net IO21_RMII_EMAC_TX_EN: 1908.08,793.11 1986.82,828.54
  rectangle net NetR40_1: 2948.87,878.14 2983.5,903.14
  region net NetR42_1: 2983.5,263.05 2933.15,263.05 2933.15,238.05 2983.5,238.05
  rectangle net ETH2X_LED2: 3002.5,238.05 3036.04,263.05
  rectangle net B-: 1177.98,-65.04 1315.45,5.83
  rectangle net OUT/BATT+: 1027.06,-65.04 1160.27,5.83
  rectangle net +5V_OUT: 731.17,-6.85 817.2,53.71
  rectangle net +5V_OUT: 440.72,-176 549.4,-133.23
  rectangle net 3.3V_ESP: 2037.75,84.78 2077.22,109.78
  region net 3.3V_ESP: 1908.49,250.5 1908.49,275.5 1857.27,275.5 1857.27,250.5
  region net 3.3V_ESP: 2004.5,275.5 2004.5,250.5 2055.72,250.5 2055.72,275.5
  region net RXD: 1060,1266.04 1038,1266.04 1038,1178.03 1060,1178.03
  rectangle net TXD: 988,1208.49 1010,1296.5
  region net 3.3V_ESP: 1109.64,871.47 1084.64,871.47 1084.64,820.24 1109.64,820.24
  rectangle net SCL: 1967.5,235.44 1985.5,275.5
  rectangle net SDA: 1927.49,235.44 1945.49,275.5
  rectangle net NetLED1_1: 167.5,-140.5 241.47,-122.5
  rectangle net 3.3V_ESP: 282.81,-157.44 340.8,-106.26
  rectangle net STDBY: 1219.1,893.11 1297.84,928.54
  rectangle net CHRG: 1219.1,843.11 1297.84,878.54
  rectangle net TP_INT: 1219.1,793.11 1297.84,828.54
  region net 3.3V_ESP: 2813.07,1270.5 2813.07,1295.5 2778.65,1295.5 2778.65,1270.5
  rectangle net AVDD: 2596.04,774.5 2621.04,830.87
  rectangle net AVDD: 2762.5,876.64 2787.5,927.87
  region net 3.3V_ESP: 2176.88,346.49 2159.21,364.17 2122.75,327.72 2140.43,310.04
  region net 3.3V_ESP: 2211.65,314.15 2193.97,331.82 2158.36,296.22 2176.04,278.54
  region net 3.3V_ESP: 2247.04,276.77 2229.36,294.45 2195.91,261 2213.59,243.32
  region net 3.3V_ESP: 2398.71,275.96 2373.71,275.96 2373.71,224.73 2398.71,224.73
  region net 3.3V_ESP: 944.43,-82.54 944.43,-107.54 995.66,-107.54 995.66,-82.54
  region net LCD_MOSI: 1420.28,410.83 1420.28,332.09 1455.72,332.09 1455.72,410.83
  rectangle net IO16_OSC_EN: 2254.35,949.03 2330.66,974.03
  rectangle net 3.3V_ESP: 2254.35,877.1 2343.66,912.1
  region net RESET: 2006.5,478.54 1927.76,478.54 1927.76,443.11 2006.5,443.11
  rectangle net SDA: 1908.08,593.11 1986.82,628.54
  rectangle net SCL: 1908.08,543.11 1986.82,578.54
  region net IO18_RMII_MDIO: 2006.5,678.54 1927.76,678.54 1927.76,643.11 2006.5,643.11
  region net IO19_RMII_EMAC_TXD0: 2006.5,728.54 1927.76,728.54 1927.76,693.11 2006.5,693.11
  rectangle net TXD: 1908.08,893.11 1986.82,928.54
  rectangle net RXD: 1908.08,843.11 1986.82,878.54
  region net IO22_RMII_EMAC_TXD1: 2006.5,978.54 1927.76,978.54 1927.76,943.11 2006.5,943.11
  region net IO23_RMII_MDC: 2006.5,1028.54 1927.76,1028.54 1927.76,993.11 2006.5,993.11
  region net LCD_BL: 1855.72,312.4 1855.72,391.14 1820.28,391.14 1820.28,312.4
  region net LCD_CS: 1805.72,312.4 1805.72,391.14 1770.28,391.14 1770.28,312.4
  region net IO27_RMII_EMAC_CRS_DV: 1317.53,528.54 1238.79,528.54 1238.79,493.11 1317.53,493.11
  region net IO26_RMII_EMAC_RXD1: 1317.53,578.54 1238.79,578.54 1238.79,543.11 1317.53,543.11
  region net IO25_RMII_EMAC_RXD0: 1317.53,628.54 1238.79,628.54 1238.79,593.11 1317.53,593.11
  rectangle net LCD_SCLK: 1219.1,443.11 1297.84,478.54
  rectangle net LCD_MISO: 1219.1,393.11 1297.84,428.54
  rectangle net EN: 2041.33,1135.11 2066.33,1189.26
  rectangle net 3.3V_ESP: 1047.02,534.4 1072.02,568.49
  rectangle net 3.3V_ESP: 1047.02,371.09 1072.02,438.39
  rectangle net 3.3V_ESP: 1094.03,334.1 1183.06,352.09
  rectangle net VUSB: 19.69,464.57 84.47,488.19
  rectangle net VUSB: 19.69,653.54 84.47,677.16
  rectangle net RESET: 2832.07,1214.19 2850.06,1295.5
  rectangle net nRST: 2326.7,294.96 2398.71,312.96
  region net AVDD: 2620.84,574.62 2620.84,613.65 2595.84,613.65 2595.84,574.62
  rectangle net AVDD: 2545,483.37 2584.04,508.37
  rectangle net AVDD: 2545,383.37 2584.04,408.37
  rectangle net +3V3_USB: 2519.55,76.07 2565.69,87.88
  rectangle net BUCK_EN: 2073.77,-154.33 2102.28,-96.32
  rectangle net BUCK_EN: 2645.03,63.83 2702.55,87.45
  rectangle net CLEAR: 2777.35,104.14 2859.43,122.14
  rectangle net OUT/BATT+: 2629.02,26.43 2702.55,50.05
  rectangle net ALRT: 1954.09,84.22 2018.75,109.78
  region net NetU2_1: 1821.37,-139.7 1821.37,-183.05 1845.78,-183.05 1845.78,-139.7
  rectangle net NetU2_1: 1541.66,-164.11 1618.61,-139.7
  rectangle net NetR48_2: 1565.68,-123.5 1663.57,-105.5
  rectangle net B-: 1380.5,-160.5 1462.53,-142.5
  rectangle net NetR52_2: 731.17,-56.85 825.42,-33.23
  rectangle net NetR51_2: 731.17,-106.85 825.42,-83.23
  rectangle net STDBY: 853.43,-107.54 925.44,-82.55
  rectangle net CHRG: 853.42,-57.54 925.43,-32.55
  rectangle net NetR50_1: 440.72,-54.12 525.77,-36.12
  rectangle net 3.3V_ESP: 261.24,117.96 286.24,186.28
GND-POWER:
  rectangle net +3V3_USB: 413.63,1031.83 657.72,1254.72

## Silkscreen, mask and mechanical layers (free items; w line width, h text height)
Top Overlay:
  text "RESET" at 3228.37,1255.01 h50
  text "BOOT" at 2326,1204.02 h30 r90
  text "RESET" at 2148.81,1189.02 h30 r90
  text "POWER" at 3228.37,-153.46 h50
Board Outline:
  lines w5: 3422.58,846.42 3422.62,846.45 ; -123.85,1358.27 1241.84,1358.27 1254.67,1358.27 1254.71,1358.23 1254.71,1114.53 1970.72,1114.53 ; -123.85,1358.27 -123.85,1358.27 ; -123.85,1358.27 -166.39,1358.27 -166.53,1358.27 ccw(c-166.53,1308.27) -216.53,1308.27 -216.53,-166.39 ccw(c-166.39,-166.39) -166.39,-216.54 3670.51,-216.53 ccw(c3670.51,-166.57) 3720.47,-166.57 3720.47,277.56 3720.47,294.57 3719.77,295.27 3421.74,295.27 3421.74,548.42 3421.74,846.45 3719.77,846.45 3720.47,847.15 3720.47,855.05 3720.47,1308.27 ccw(c3670.46,1308.27) 3670.46,1358.27 1970.76,1358.27 1970.72,1358.23 1970.72,1114.53 ; 1970.72,1114.53 1970.72,1114.53 ; 378,308.5 691.38,308.5 691.38,819.93 378,819.93 378,308.5 ; 4536,-383.5 7350.65,-383.5 7350.65,1565 4536,1565 4536,-383.5
  text "KEEPOUT" at 549,461.03 h30 r90

## Dimensions
3503.94,1141.73 to 0,1141.73 on Dimensions
3503.94,0 to 3503.94,1141.73 on Dimensions
-166.39,-216.54 to -166.39,1358.27 on Dimensions
-216.53,-166.39 to 3720.47,-166.57 on Dimensions

## Text inside footprints (layer, text, board x,y; h text height)
J3: Top Overlay "PCB Edge" at 1107.17,-203.39 h31.5
J4: Top Overlay "1" at 845.03,735.87 h19.68 r270; Top Overlay "18" at 846.03,410.87 h19.68 r270; Mechanical 13 "PCB Edge" at 714.44,617.55 h19.68 r270